# EAGLE board syacan (EAGLE 9.6.2)
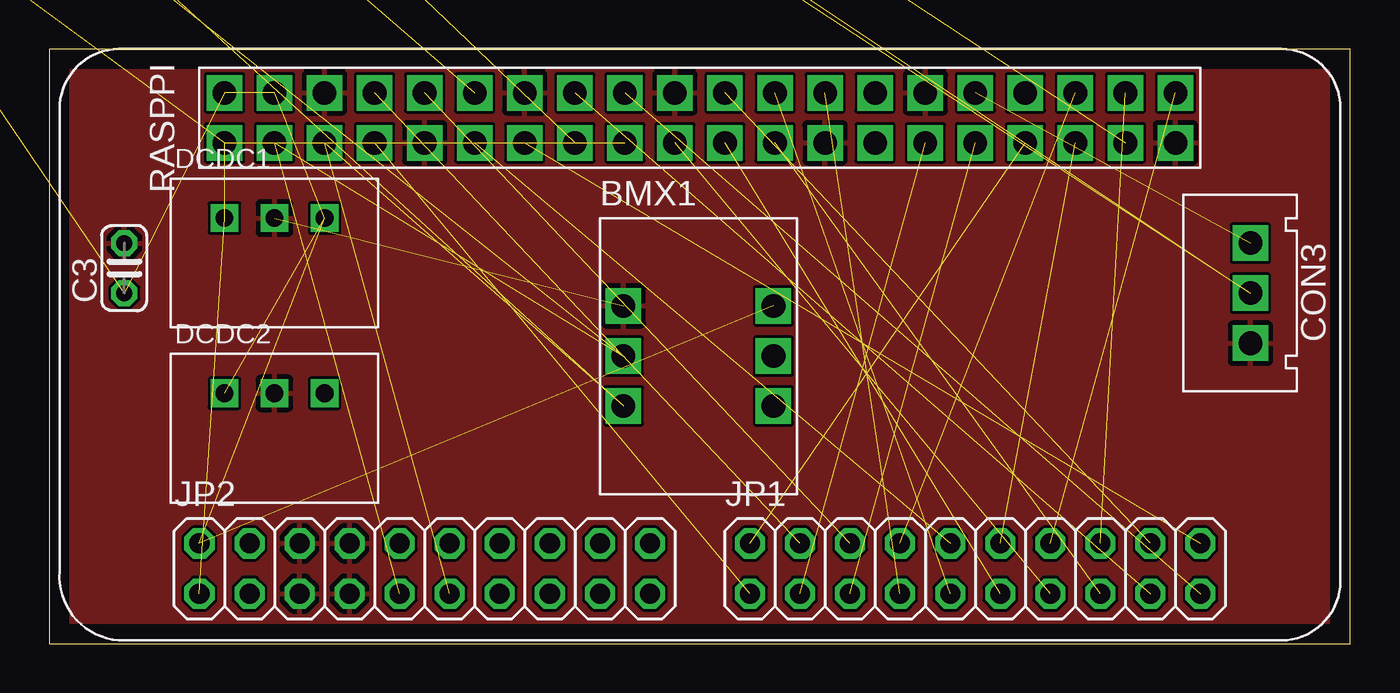
[diagram p0: board, top side]
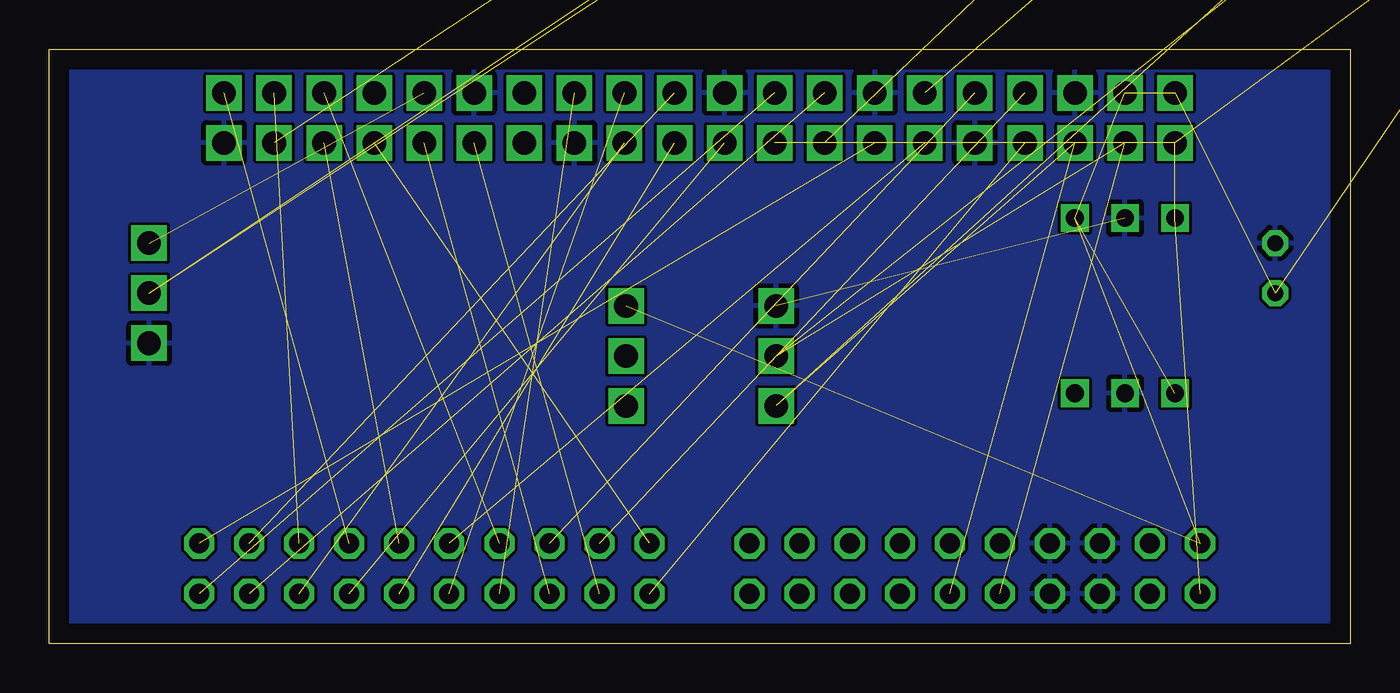
[diagram p1: board, bottom side, seen from below]

Size 66.02 x 30.15 mm. Coordinates in mm from the lower left corner, seen from the top.
Outline: 0,0 66.02,0 66.02,30.15 0,30.15 0,0
Copper layers (1*16): Top 0.035mm / dielectric 1.5mm / Bottom 0.035mm
Design rules "default": minimum track width 6mil, minimum drill 0.35mm, track to track 6mil, track to pad 6mil, pad to pad 6mil, via to via 6mil, smd to smd 6mil, copper to edge 40mil, drill to drill 6mil, minimum pad ring 10mil, minimum via ring 8mil, stop-mask expansion 4mil, vias tented up to drill 0mil, thermal gap 10mil
Net classes: 0 default: width 0.406 mm

## Footprints (pad centres in the part's own frame; a part is rotated, then mirrored left to right if it is on the bottom)
BMX055 = drill 1.2 pad 1.5 square: 3V3 8.81,-9.53; GND 1.19,-4.46; SCL 1.19,-9.53; SDA 1.19,-7; VCC 8.81,-4.46; VCCIO 8.81,-7
C025-024X044 = drill 0.813 octagon: 1 -1.27,0; 2 1.27,0
3PIN = drill 1.2 square: P$1 2.54,-2.54; P$2 5.08,-2.54; P$3 7.62,-2.54
3.3V1A_M78AR033-1 = drill 0.9 pad 1.27 square: GND 0,0; VIN 2.54,0; VOUT -2.54,0
2X10 = drill 1.016 octagon: 1 -11.43,-1.27; 2 -11.43,1.27; 3 -8.89,-1.27; 4 -8.89,1.27; 5 -6.35,-1.27; 6 -6.35,1.27; 7 -3.81,-1.27; 8 -3.81,1.27; 9 -1.27,-1.27; 10 -1.27,1.27; 11 1.27,-1.27; 12 1.27,1.27; 13 3.81,-1.27; 14 3.81,1.27; 15 6.35,-1.27; 16 6.35,1.27; 17 8.89,-1.27; 18 8.89,1.27; 19 11.43,-1.27; 20 11.43,1.27
OSXX1608C1A = smd 0.8 x 0.8: AN -0.75,0; CT 0.75,0
SSM6J808R = smd 0.6 x 1.5: 1 -0.95,-1.25; 2 0,-1.25; 3 0.95,-1.25; 4 0.95,1.25; 5 0,1.25; 6 -0.95,1.25
2PIN = drill 1.2 square: P$1 -1.27,0; P$2 1.27,0
0204/7 = drill 0.813 octagon: 1 -3.81,0; 2 3.81,0
R0603 = smd 1 x 1.1: 1 -0.85,0; 2 0.85,0
RASPBERYPIZEROW = drill 1.2 pad 1.676 square: 3.3V1 -1.27,24.13; 3.3V2 -1.27,3.81; 5V1 1.27,24.13; 5V2 1.27,21.59; GND1 -1.27,13.97; GND2 -1.27,-6.35; GND3 -1.27,-24.13; GND4 1.27,19.05; GND5 1.27,8.89; GND6 1.27,1.27; GND7 1.27,-11.43; GND8 1.27,-16.51; GPIO2 -1.27,21.59; GPIO3 -1.27,19.05; GPIO4 -1.27,16.51; GPIO5 -1.27,-11.43; GPIO6 -1.27,-13.97; GPIO7 1.27,-6.35; GPIO8 1.27,-3.81; GPIO9 -1.27,-1.27; GPIO10 -1.27,1.27; GPIO11 -1.27,-3.81; GPIO12 1.27,-13.97; GPIO13 -1.27,-16.51; GPIO14 1.27,16.51; GPIO15 1.27,13.97; GPIO16 1.27,-19.05; GPIO17 -1.27,11.43; GPIO18 1.27,11.43; GPIO19 -1.27,-19.05; GPIO20 1.27,-21.59; GPIO21 1.27,-24.13; GPIO22 -1.27,6.35; GPIO23 1.27,6.35; GPIO24 1.27,3.81; GPIO25 1.27,-1.27; GPIO26 -1.27,-21.59; GPIO27 -1.27,8.89; ID_SC 1.27,-8.89; ID_SD -1.27,-8.89
SRIDE_SWITCH = drill 1: L -2.5,0; LR 0,0; R 2.5,0

## Placement (x,y rotation side)
BMX1  BMX055  [BMX055]  27.94,21.59 0 top
C1  3.3uF  [C025-024X044]  -71.12,85.09 0 top  (outside the outline)
C3  3.3uF  [C025-024X044]  3.81,19.05 90 top
CON1  [3PIN]  -46.99,87.63 0 top  (outside the outline)
CON3  [3PIN]  63.5,22.86 270 top
DCDC1  [3.3V1A_M78AR033-1]  11.43,21.59 0 top
DCDC2  [3.3V1A_M78AR033-1]  11.43,12.7 0 top
JP1  [2X10]  46.99,3.81 0 top
JP2  [2X10]  19.05,3.81 0 top
L1  [OSXX1608C1A]  -73.66,92.71 0 top  (outside the outline)
L3  [OSXX1608C1A]  -13.97,100.33 0 top  (outside the outline)
MOS1  [SSM6J808R]  -30.48,93.98 0 top  (outside the outline)
MOS2  [SSM6J808R]  -34.29,93.98 0 top  (outside the outline)
PW  [2PIN]  -63.5,85.09 0 top  (outside the outline)
R1  4.7k  [0204/7]  -57.15,93.98 0 top  (outside the outline)
R2  4.7k  [0204/7]  -67.31,93.98 0 top  (outside the outline)
R10  100k  [R0603]  -40.64,95.25 0 top  (outside the outline)
R12  100  [R0603]  -45.72,95.25 0 top  (outside the outline)
R14  100  [R0603]  -50.8,95.25 0 top  (outside the outline)
RASPPI  RASPBERYPIZEROW  [RASPBERYPIZEROW]  33.02,26.67 90 top
RPSW  SRIDE_SWITCH  [SRIDE_SWITCH]  -24.13,93.98 0 top  (outside the outline)

## Library data of the parts
BMX1 = BMX055
C1 C3 = rcl; SPICEPREFIX: C
CON1 CON3 PW = XR Connector
DCDC1 DCDC2 = DC-DC
JP1 JP2 = pinhead
L1 L3 = Chip LED
MOS1 MOS2 = Chip MOSFET
R1 R2 R10 R12 R14 = rcl; SPICEPREFIX: R
RASPPI = RaspberyPiZeroW
RPSW = Sride Switch

## Nets
3V3: BMX1.3V3
7.4V: DCDC2.VIN
+3V3: C1.1 DCDC1.VOUT JP2.1 RASPPI.3.3V1 RASPPI.3.3V2
+5V: BMX1.VCC C3.1 CON1.P$2 CON3.P$2 DCDC1.VIN DCDC2.VOUT JP2.2 R1.2 R2.2 RASPPI.5V1 RASPPI.5V2
+7.4V: MOS2.1 MOS2.2 MOS2.5 MOS2.6
BATT: MOS1.1 MOS1.2 MOS1.5 MOS1.6 PW.P$2
GND: BMX1.GND C1.2 C3.2 CON1.P$3 CON3.P$3 DCDC1.GND DCDC2.GND JP2.5 JP2.6 JP2.7 JP2.8 L1.CT L3.CT MOS1.3 PW.P$1 RASPPI.GND1 RASPPI.GND2 RASPPI.GND3 RASPPI.GND4 RASPPI.GND5 RASPPI.GND6 RASPPI.GND7 RPSW.LR
GPIO4: JP1.1 RASPPI.GPIO4
GPIO5: JP1.3 RASPPI.GPIO5
GPIO6: JP1.5 RASPPI.GPIO6
GPIO7: JP1.7 RASPPI.GPIO7
GPIO8: JP1.9 RASPPI.GPIO8
GPIO9: JP1.11 RASPPI.GPIO9
GPIO10: JP1.13 RASPPI.GPIO10
GPIO11: JP1.15 RASPPI.GPIO11
GPIO13: JP1.2 RASPPI.GPIO13
GPIO14: JP1.4 RASPPI.GPIO14
GPIO15: JP1.6 RASPPI.GPIO15
GPIO16: JP1.8 RASPPI.GPIO16
GPIO17: JP1.10 RASPPI.GPIO17
GPIO19: JP1.12 RASPPI.GPIO19
GPIO20: JP1.16 RASPPI.GPIO20
GPIO21: JP1.14 RASPPI.GPIO21
GPIO23: JP1.17 RASPPI.GPIO23
GPIO24: JP1.19 RASPPI.GPIO24
GPIO25: JP1.18 RASPPI.GPIO25
GPIO27: JP1.20 RASPPI.GPIO27
LED0: R12.1 RASPPI.GPIO22
LED2: R14.1 RASPPI.GPIO26
N$1: JP2.13
N$2: JP2.15
N$3: L1.AN R12.2
N$4: JP2.3
N$5: L3.AN R14.2
N$6: MOS1.4 MOS2.4 R10.2
N$7: MOS2.3 R10.1 RPSW.L
N$8: JP2.4
SCL: BMX1.SCL JP2.11 R1.1 RASPPI.GPIO3
SDA: BMX1.SDA JP2.9 R2.1 RASPPI.GPIO2
SV0: CON3.P$1 RASPPI.GPIO12
SV2: CON1.P$1 RASPPI.GPIO18
VCCIO: BMX1.VCCIO

## Tracks (layer width: path | path; a pad name or v marks a point on that pad's centre or on a via)
+3V3  (4 unrouted)
+5V  (10 unrouted)
+7.4V  (3 unrouted)
BATT  (4 unrouted)
GND  (1 unrouted)
  pour Top: -6.35,-31.75 -49.53,-31.75 -83.82,2.54 -87.63,6.35 -87.63,93.98 -57.15,124.46 -52.07,124.46 13.97,124.46 93.98,44.45 93.98,12.7 53.34,-27.94 49.53,-31.75
  pour Bottom: -49.53,-31.75 -87.63,6.35 -87.63,92.71 -87.63,93.98 -57.15,124.46 13.97,124.46 93.98,44.45 93.98,12.7 49.53,-31.75
GPIO4  (1 unrouted)
GPIO5  (1 unrouted)
GPIO6  (1 unrouted)
GPIO7  (1 unrouted)
GPIO8  (1 unrouted)
GPIO9  (1 unrouted)
GPIO10  (1 unrouted)
GPIO11  (1 unrouted)
GPIO13  (1 unrouted)
GPIO14  (1 unrouted)
GPIO15  (1 unrouted)
GPIO16  (1 unrouted)
GPIO17  (1 unrouted)
GPIO19  (1 unrouted)
GPIO20  (1 unrouted)
GPIO21  (1 unrouted)
GPIO23  (1 unrouted)
GPIO24  (1 unrouted)
GPIO25  (1 unrouted)
GPIO27  (1 unrouted)
LED0  (1 unrouted)
LED2  (1 unrouted)
N$3  (1 unrouted)
N$5  (1 unrouted)
N$6  (2 unrouted)
N$7  (2 unrouted)
SCL  (3 unrouted)
SDA  (3 unrouted)
SV0  (1 unrouted)
SV2  (1 unrouted)